# Allegro board kprd_03v1.brd
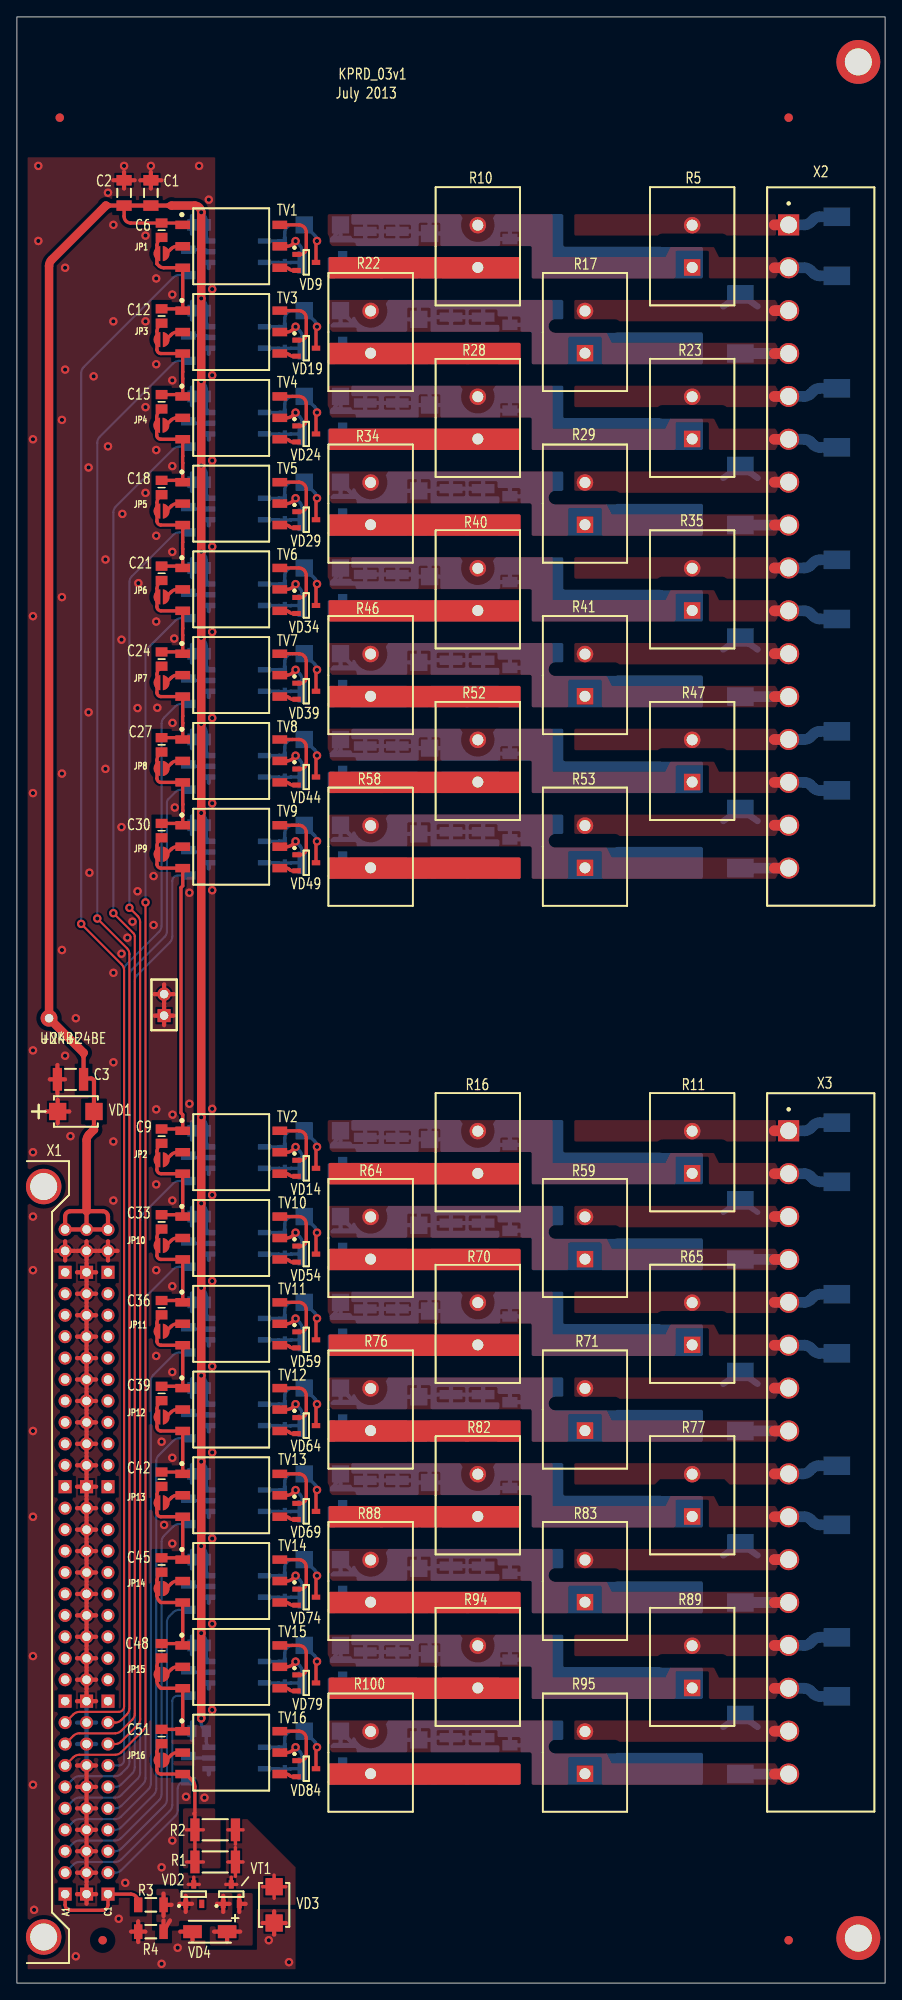
[diagram p0: board, top side]
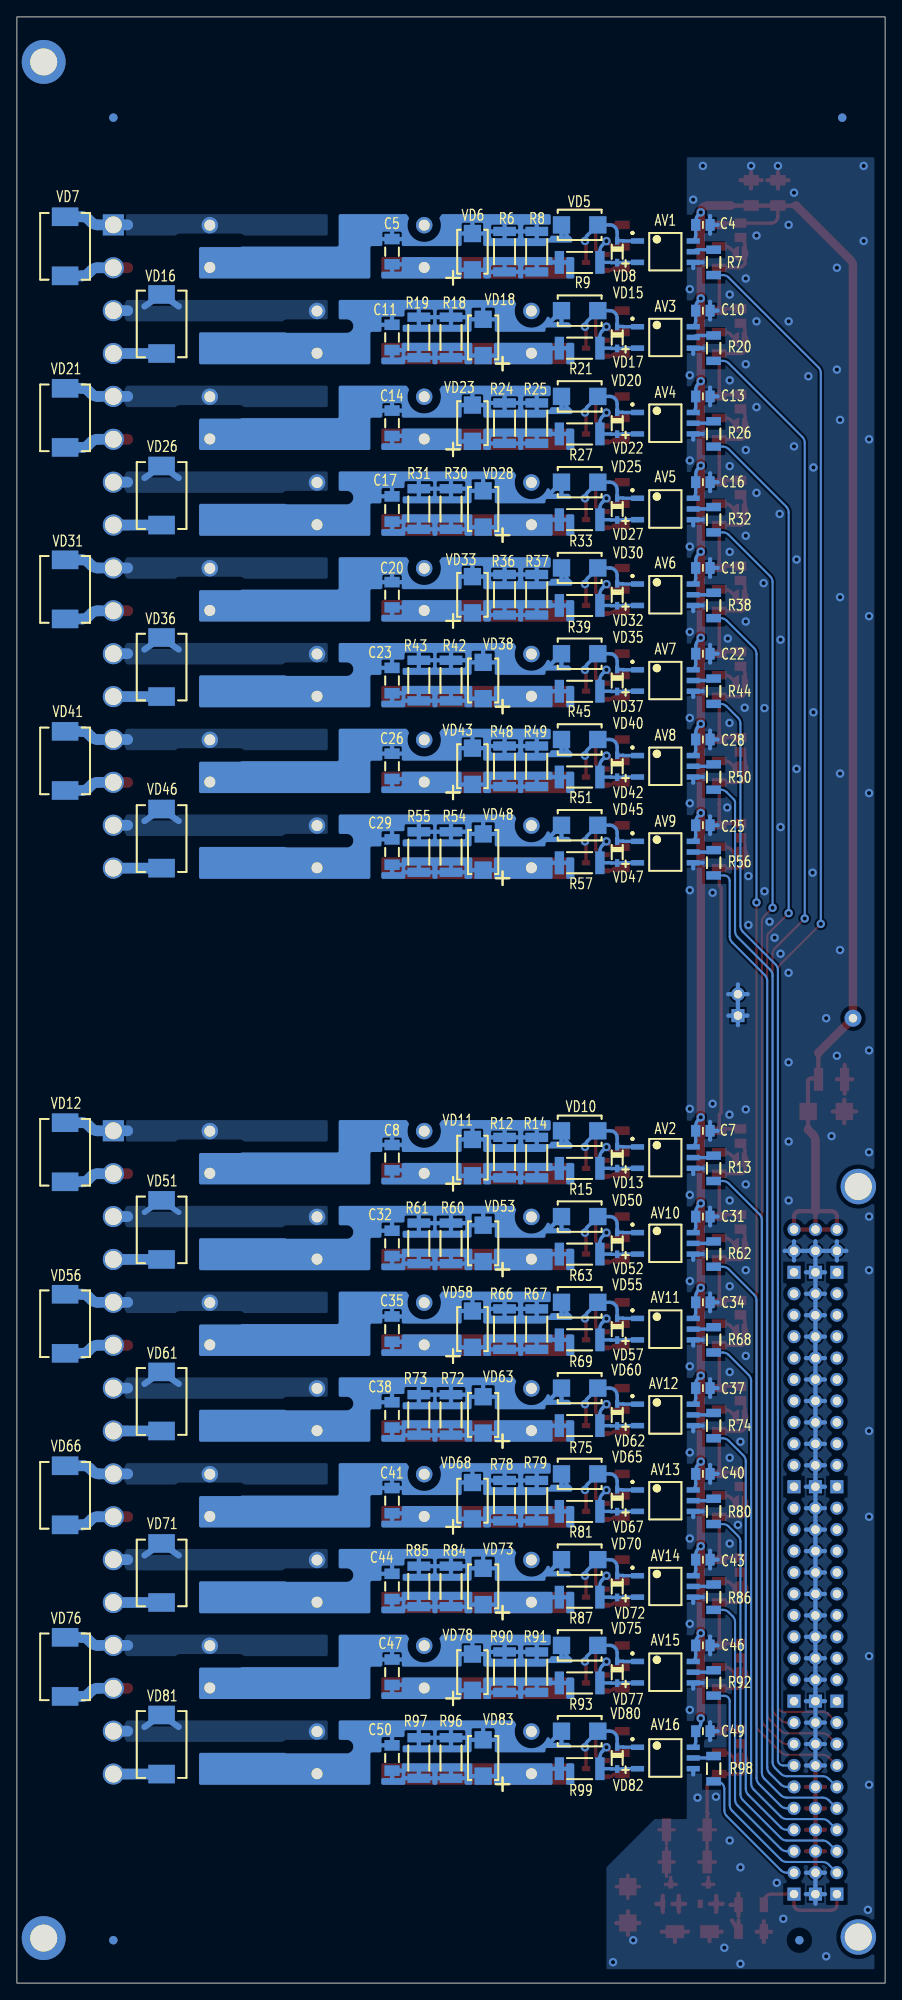
[diagram p1: board, bottom side, seen from below]

Outline 102.87 x 232.92 mm; copper layers: TOP, BOTTOM. Coordinates in mm from the lower left corner of the outline.
Outline path: rectangle 0,0 102.87,232.92

## Design rules (mm)
net group IN+: nets +IN1 +IN2 +IN3 +IN4 +IN5 +IN6 +IN7 +IN8 +IN9 +IN10 +IN11 +IN12 +IN13 +IN14 +IN15 +IN16
net group IN-: nets -IN1 -IN2 -IN3 -IN4 -IN5 -IN6 -IN7 -IN8 -IN9 -IN10 -IN11 -IN12 -IN13 -IN14 -IN15 -IN16
nets with their own width: min track width 0.4; nets +24BE

## Placement (name value [footprint] x y rotation side)
AV1  ACPL-M50L  [SOIC127P650X260-5]  26.04 205.1 180 bottom
AV2  ACPL-M50L  [SOIC127P650X260-5]  26.04 97.79 180 bottom
AV3  ACPL-M50L  [SOIC127P650X260-5]  26.04 194.94 180 bottom
AV4  ACPL-M50L  [SOIC127P650X260-5]  26.04 184.78 180 bottom
AV5  ACPL-M50L  [SOIC127P650X260-5]  26.04 174.62 180 bottom
AV6  ACPL-M50L  [SOIC127P650X260-5]  26.04 164.47 180 bottom
AV7  ACPL-M50L  [SOIC127P650X260-5]  26.04 154.31 180 bottom
AV8  ACPL-M50L  [SOIC127P650X260-5]  26.04 144.15 180 bottom
AV9  ACPL-M50L  [SOIC127P650X260-5]  26.04 133.99 180 bottom
AV10  ACPL-M50L  [SOIC127P650X260-5]  26.04 87.63 180 bottom
AV11  ACPL-M50L  [SOIC127P650X260-5]  26.04 77.47 180 bottom
AV12  ACPL-M50L  [SOIC127P650X260-5]  26.04 67.31 180 bottom
AV13  ACPL-M50L  [SOIC127P650X260-5]  26.04 57.15 180 bottom
AV14  ACPL-M50L  [SOIC127P650X260-5]  26.04 46.99 180 bottom
AV15  ACPL-M50L  [SOIC127P650X260-5]  26.04 36.83 180 bottom
AV16  ACPL-M50L  [SOIC127P650X260-5]  26.04 26.67 180 bottom
C1  0.1u  [CAPC3216X145N]  15.88 212.07 90 top
C2  1.0u  [CAPC3216X95N]  12.7 212.07 90 top
C3  10.0u  [CAPC3225X270N]  6.35 107.06 180 top
C4  0.1u  [CAPC2013X95N]  21.59 208.28 180 bottom
C5  0.1u  [CAPC3216X145N]  58.42 205.1 270 bottom
C6  2200p  [CAPC2013X70N]  17.14 207.65 270 top
C7  0.1u  [CAPC2013X95N]  21.59 100.97 180 bottom
C8  0.1u  [CAPC3216X145N]  58.42 97.79 270 bottom
C9  2200p  [CAPC2013X70N]  17.14 100.33 270 top
C10  0.1u  [CAPC2013X95N]  21.59 198.12 180 bottom
C11  0.1u  [CAPC3216X145N]  58.42 194.94 270 bottom
C12  2200p  [CAPC2013X70N]  17.14 197.48 270 top
C13  0.1u  [CAPC2013X95N]  21.59 187.96 180 bottom
C14  0.1u  [CAPC3216X145N]  58.42 184.78 270 bottom
C15  2200p  [CAPC2013X70N]  17.14 187.32 270 top
C16  0.1u  [CAPC2013X95N]  21.59 177.8 180 bottom
C17  0.1u  [CAPC3216X145N]  58.42 174.62 270 bottom
C18  2200p  [CAPC2013X70N]  17.14 177.16 270 top
C19  0.1u  [CAPC2013X95N]  21.59 167.64 180 bottom
C20  0.1u  [CAPC3216X145N]  58.42 164.47 270 bottom
C21  2200p  [CAPC2013X70N]  17.14 167 270 top
C22  0.1u  [CAPC2013X95N]  21.59 157.48 180 bottom
C23  0.1u  [CAPC3216X145N]  58.42 154.31 270 bottom
C24  2200p  [CAPC2013X70N]  17.14 156.84 270 top
C25  0.1u  [CAPC2013X95N]  21.59 137.16 180 bottom
C26  0.1u  [CAPC3216X145N]  58.42 144.15 270 bottom
C27  2200p  [CAPC2013X70N]  17.14 146.69 270 top
C28  0.1u  [CAPC2013X95N]  21.59 147.32 180 bottom
C29  0.1u  [CAPC3216X145N]  58.42 133.99 270 bottom
C30  2200p  [CAPC2013X70N]  17.14 136.53 270 top
C31  0.1u  [CAPC2013X95N]  21.59 90.8 180 bottom
C32  0.1u  [CAPC3216X145N]  58.42 87.63 270 bottom
C33  2200p  [CAPC2013X70N]  17.14 90.17 270 top
C34  0.1u  [CAPC2013X95N]  21.59 80.64 180 bottom
C35  0.1u  [CAPC3216X145N]  58.42 77.47 270 bottom
C36  2200p  [CAPC2013X70N]  17.14 80.01 270 top
C37  0.1u  [CAPC2013X95N]  21.59 70.48 180 bottom
C38  0.1u  [CAPC3216X145N]  58.42 67.31 270 bottom
C39  2200p  [CAPC2013X70N]  17.14 69.85 270 top
C40  0.1u  [CAPC2013X95N]  21.59 60.33 180 bottom
C41  0.1u  [CAPC3216X145N]  58.42 57.15 270 bottom
C42  2200p  [CAPC2013X70N]  17.14 59.69 270 top
C43  0.1u  [CAPC2013X95N]  21.59 50.17 180 bottom
C44  0.1u  [CAPC3216X145N]  58.42 46.99 270 bottom
C45  2200p  [CAPC2013X70N]  17.14 49.53 270 top
C46  0.1u  [CAPC2013X95N]  21.59 40 180 bottom
C47  0.1u  [CAPC3216X145N]  58.42 36.83 270 bottom
C48  2200p  [CAPC2013X70N]  17.14 39.37 270 top
C49  0.1u  [CAPC2013X95N]  21.59 29.84 180 bottom
C50  0.1u  [CAPC3216X145N]  58.42 26.67 270 bottom
C51  2200p  [CAPC2013X70N]  17.14 29.21 270 top
JP1  SMD_JUMPER  [SMD_JUMPER_2]  17.14 204.88 90 top
JP2  SMD_JUMPER  [SMD_JUMPER_2]  17.14 97.54 90 top
JP3  SMD_JUMPER  [SMD_JUMPER_2]  17.14 194.69 90 top
JP4  SMD_JUMPER  [SMD_JUMPER_2]  17.12 184.54 90 top
JP5  SMD_JUMPER  [SMD_JUMPER_2]  17.14 174.37 90 top
JP6  SMD_JUMPER  [SMD_JUMPER_2]  17.14 164.21 90 top
JP7  SMD_JUMPER  [SMD_JUMPER_2]  17.14 154.05 90 top
JP8  SMD_JUMPER  [SMD_JUMPER_2]  17.14 143.89 90 top
JP9  SMD_JUMPER  [SMD_JUMPER_2]  17.14 133.73 90 top
JP10  SMD_JUMPER  [SMD_JUMPER_2]  17.14 87.38 90 top
JP11  SMD_JUMPER  [SMD_JUMPER_2]  17.14 77.22 90 top
JP12  SMD_JUMPER  [SMD_JUMPER_2]  17.14 67.06 90 top
JP13  SMD_JUMPER  [SMD_JUMPER_2]  17.14 56.9 90 top
JP14  SMD_JUMPER  [SMD_JUMPER_2]  17.14 46.74 90 top
JP15  SMD_JUMPER  [SMD_JUMPER_2]  17.14 36.58 90 top
JP16  SMD_JUMPER  [SMD_JUMPER_2]  17.14 26.42 90 top
NOREF  -  [unnamed]  91.44 5.08 0 top
NOREF#2  -  [unnamed#2]  99.7 227.58 0 top
NOREF#3  -  [unnamed]  91.44 220.98 0 top
NOREF#4  -  [unnamed]  10.16 5.08 0 top
NOREF#5  -  [unnamed]  5.08 220.98 0 top
NOREF#6  -  [unnamed#2]  99.7 5.33 0 top
NOREF#7  -  [unnamed]  91.44 220.98 180 bottom
NOREF#8  -  [unnamed]  91.44 5.08 180 bottom
NOREF#9  -  [unnamed]  5.08 220.98 180 bottom
NOREF#10  -  [unnamed]  10.16 5.08 180 bottom
R1  1k  [RESC5025X65N]  23.5 14.35 180 top
R2  1k  [RESC5025X65N]  23.5 18.16 180 top
R3  1k  [RESC3116X65N]  15.88 9.27 0 top
R4  2k  [RESC3116X65N]  15.88 6.1 0 top
R5  5.1k  [RESV500P1300W900L2500H]  80.01 205.74 90 top
R6  1k  [RESC5025X65N]  45.08 205.1 90 bottom
R7  2k  [RESC3116X65N]  20.32 203.84 90 bottom
R8  1.2k  [RESC5025X65N]  41.28 205.1 90 bottom
R9  100  [RESC5025X65N]  36.2 203.84 0 bottom
R10  5.1k  [RESV500P1300W900L2500H]  54.61 205.74 90 top
R11  5.1k  [RESV500P1300W900L2500H]  80.01 98.42 90 top
R12  1k  [RESC5025X65N]  45.08 97.79 90 bottom
R13  2k  [RESC3116X65N]  20.32 96.52 90 bottom
R14  1.2k  [RESC5025X65N]  41.28 97.79 90 bottom
R15  100  [RESC5025X65N]  36.2 96.52 0 bottom
R16  5.1k  [RESV500P1300W900L2500H]  54.61 98.42 90 top
R17  5.1k  [RESV500P1300W900L2500H]  67.31 195.58 90 top
R18  1k  [RESC5025X65N]  51.44 194.94 90 bottom
R19  1.2k  [RESC5025X65N]  55.25 194.94 90 bottom
R20  2k  [RESC3116X65N]  20.32 193.67 90 bottom
R21  100  [RESC5025X65N]  36.2 193.67 0 bottom
R22  5.1k  [RESV500P1300W900L2500H]  41.91 195.58 90 top
R23  5.1k  [RESV500P1300W900L2500H]  80.01 185.42 90 top
R24  1k  [RESC5025X65N]  45.08 184.78 90 bottom
R25  1.2k  [RESC5025X65N]  41.28 184.78 90 bottom
R26  2k  [RESC3116X65N]  20.32 183.51 90 bottom
R27  100  [RESC5025X65N]  36.2 183.51 0 bottom
R28  5.1k  [RESV500P1300W900L2500H]  54.61 185.42 90 top
R29  5.1k  [RESV500P1300W900L2500H]  67.31 175.26 90 top
R30  1k  [RESC5025X65N]  51.44 174.62 90 bottom
R31  1.2k  [RESC5025X65N]  55.25 174.62 90 bottom
R32  2k  [RESC3116X65N]  20.32 173.35 90 bottom
R33  100  [RESC5025X65N]  36.2 173.35 0 bottom
R34  5.1k  [RESV500P1300W900L2500H]  41.91 175.26 90 top
R35  5.1k  [RESV500P1300W900L2500H]  80.01 165.1 90 top
R36  1k  [RESC5025X65N]  45.08 164.47 90 bottom
R37  1.2k  [RESC5025X65N]  41.28 164.47 90 bottom
R38  2k  [RESC3116X65N]  20.32 163.19 90 bottom
R39  100  [RESC5025X65N]  36.2 163.19 0 bottom
R40  5.1k  [RESV500P1300W900L2500H]  54.61 165.1 90 top
R41  5.1k  [RESV500P1300W900L2500H]  67.31 154.94 90 top
R42  1k  [RESC5025X65N]  51.44 154.31 90 bottom
R43  1.2k  [RESC5025X65N]  55.25 154.31 90 bottom
R44  2k  [RESC3116X65N]  20.32 153.03 90 bottom
R45  100  [RESC5025X65N]  36.2 153.03 0 bottom
R46  5.1k  [RESV500P1300W900L2500H]  41.91 154.94 90 top
R47  5.1k  [RESV500P1300W900L2500H]  80.01 144.78 90 top
R48  1k  [RESC5025X65N]  45.08 144.15 90 bottom
R49  1.2k  [RESC5025X65N]  41.28 144.15 90 bottom
R50  2k  [RESC3116X65N]  20.32 142.88 90 bottom
R51  100  [RESC5025X65N]  36.2 142.88 0 bottom
R52  5.1k  [RESV500P1300W900L2500H]  54.61 144.78 90 top
R53  5.1k  [RESV500P1300W900L2500H]  67.31 134.62 90 top
R54  1k  [RESC5025X65N]  51.44 133.99 90 bottom
R55  1.2k  [RESC5025X65N]  55.25 133.99 90 bottom
R56  2k  [RESC3116X65N]  20.32 132.72 90 bottom
R57  100  [RESC5025X65N]  36.2 132.72 0 bottom
R58  5.1k  [RESV500P1300W900L2500H]  41.91 134.62 90 top
R59  5.1k  [RESV500P1300W900L2500H]  67.31 88.27 90 top
R60  1k  [RESC5025X65N]  51.44 87.63 90 bottom
R61  1.2k  [RESC5025X65N]  55.25 87.63 90 bottom
R62  2k  [RESC3116X65N]  20.32 86.36 90 bottom
R63  100  [RESC5025X65N]  36.2 86.36 0 bottom
R64  5.1k  [RESV500P1300W900L2500H]  41.91 88.27 90 top
R65  5.1k  [RESV500P1300W900L2500H]  80.01 78.1 90 top
R66  1k  [RESC5025X65N]  45.08 77.47 90 bottom
R67  1.2k  [RESC5025X65N]  41.28 77.47 90 bottom
R68  2k  [RESC3116X65N]  20.32 76.2 90 bottom
R69  100  [RESC5025X65N]  36.2 76.2 0 bottom
R70  5.1k  [RESV500P1300W900L2500H]  54.61 78.1 90 top
R71  5.1k  [RESV500P1300W900L2500H]  67.31 67.95 90 top
R72  1k  [RESC5025X65N]  51.44 67.31 90 bottom
R73  1.2k  [RESC5025X65N]  55.25 67.31 90 bottom
R74  2k  [RESC3116X65N]  20.32 66.04 90 bottom
R75  100  [RESC5025X65N]  36.2 66.04 0 bottom
R76  5.1k  [RESV500P1300W900L2500H]  41.91 67.95 90 top
R77  5.1k  [RESV500P1300W900L2500H]  80.01 57.78 90 top
R78  1k  [RESC5025X65N]  45.08 57.15 90 bottom
R79  1.2k  [RESC5025X65N]  41.28 57.15 90 bottom
R80  2k  [RESC3116X65N]  20.32 55.88 90 bottom
R81  100  [RESC5025X65N]  36.2 55.88 0 bottom
R82  5.1k  [RESV500P1300W900L2500H]  54.61 57.78 90 top
R83  5.1k  [RESV500P1300W900L2500H]  67.31 47.62 90 top
R84  1k  [RESC5025X65N]  51.44 46.99 90 bottom
R85  1.2k  [RESC5025X65N]  55.25 46.99 90 bottom
R86  2k  [RESC3116X65N]  20.32 45.72 90 bottom
R87  100  [RESC5025X65N]  36.2 45.72 0 bottom
R88  5.1k  [RESV500P1300W900L2500H]  41.91 47.62 90 top
R89  5.1k  [RESV500P1300W900L2500H]  80.01 37.47 90 top
R90  1k  [RESC5025X65N]  45.08 36.83 90 bottom
R91  1.2k  [RESC5025X65N]  41.28 36.83 90 bottom
R92  2k  [RESC3116X65N]  20.32 35.56 90 bottom
R93  100  [RESC5025X65N]  36.2 35.56 0 bottom
R94  5.1k  [RESV500P1300W900L2500H]  54.61 37.47 90 top
R95  5.1k  [RESV500P1300W900L2500H]  67.31 27.3 90 top
R96  1k  [RESC5025X65N]  51.44 26.67 90 bottom
R97  1.2k  [RESC5025X65N]  55.25 26.67 90 bottom
R98  2k  [RESC3116X65N]  20.32 25.4 90 bottom
R99  100  [RESC5025X65N]  36.2 25.4 0 bottom
R100  5.1k  [RESV500P1300W900L2500H]  41.91 27.3 90 top
TV1  78253  [XFMR_78253MVC]  25.4 205.74 0 top
TV2  78253  [XFMR_78253MVC]  25.4 98.42 0 top
TV3  78253  [XFMR_78253MVC]  25.4 195.58 0 top
TV4  78253  [XFMR_78253MVC]  25.4 185.42 0 top
TV5  78253  [XFMR_78253MVC]  25.4 175.26 0 top
TV6  78253  [XFMR_78253MVC]  25.4 165.1 0 top
TV7  78253  [XFMR_78253MVC]  25.4 154.94 0 top
TV8  78253  [XFMR_78253MVC]  25.4 144.78 0 top
TV9  78253  [XFMR_78253MVC]  25.4 134.62 0 top
TV10  78253  [XFMR_78253MVC]  25.4 88.27 0 top
TV11  78253  [XFMR_78253MVC]  25.4 78.1 0 top
TV12  78253  [XFMR_78253MVC]  25.4 67.95 0 top
TV13  78253  [XFMR_78253MVC]  25.4 57.78 0 top
TV14  78253  [XFMR_78253MVC]  25.4 47.62 0 top
TV15  78253  [XFMR_78253MVC]  25.4 37.47 0 top
TV16  78253  [XFMR_78253MVC]  25.4 27.3 0 top
UNK+24BE  0.85mm  [MTG_085_200]  3.81 114.3 0 top
VD1  30B  [DIOM5236X261N]  6.98 103.25 180 top
VD2  BAT54C  [SOT95P230X110-3N]  20.95 10.54 90 top
VD3  47B  [DIOM5236X261N]  30.48 9.27 270 top
VD4  STPS160A  [DIOM5126X265N]  22.86 6.1 0 top
VD5  6.8B  [DIOM5236X261N]  36.2 208.28 180 bottom
VD6  18B  [DIOM5236X261N]  48.89 205.1 270 bottom
VD7  300B  [DIOM7959X262N]  97.16 205.74 270 bottom
VD8  1N4148WS  [SOD2513X100N]  31.75 205.1 270 bottom
VD9  BAT54C  [SOT95P230X110-3N]  34.29 203.84 0 top
VD10  6.8B  [DIOM5236X261N]  36.2 100.97 180 bottom
VD11  18B  [DIOM5236X261N]  48.89 97.79 270 bottom
VD12  300B  [DIOM7959X262N]  97.16 98.42 270 bottom
VD13  1N4148WS  [SOD2513X100N]  31.75 97.79 270 bottom
VD14  BAT54C  [SOT95P230X110-3N]  34.29 96.52 0 top
VD15  6.8B  [DIOM5236X261N]  36.2 198.12 180 bottom
VD16  300B  [DIOM7959X262N]  85.73 196.54 270 bottom
VD17  1N4148WS  [SOD2513X100N]  31.75 194.94 270 bottom
VD18  18B  [DIOM5236X261N]  47.62 194.94 270 bottom
VD19  BAT54C  [SOT95P230X110-3N]  34.29 193.67 0 top
VD20  6.8B  [DIOM5236X261N]  36.2 187.96 180 bottom
VD21  300B  [DIOM7959X262N]  97.16 185.42 270 bottom
VD22  1N4148WS  [SOD2513X100N]  31.75 184.78 270 bottom
VD23  18B  [DIOM5236X261N]  48.89 184.78 270 bottom
VD24  BAT54C  [SOT95P230X110-3N]  34.29 183.51 0 top
VD25  6.8B  [DIOM5236X261N]  36.2 177.8 180 bottom
VD26  300B  [DIOM7959X262N]  85.73 176.22 270 bottom
VD27  1N4148WS  [SOD2513X100N]  31.75 174.62 270 bottom
VD28  18B  [DIOM5236X261N]  47.62 174.62 270 bottom
VD29  BAT54C  [SOT95P230X110-3N]  34.29 173.35 0 top
VD30  6.8B  [DIOM5236X261N]  36.2 167.64 180 bottom
VD31  300B  [DIOM7959X262N]  97.16 165.1 270 bottom
VD32  1N4148WS  [SOD2513X100N]  31.75 164.47 270 bottom
VD33  18B  [DIOM5236X261N]  48.89 164.47 270 bottom
VD34  BAT54C  [SOT95P230X110-3N]  34.29 163.19 0 top
VD35  6.8B  [DIOM5236X261N]  36.2 157.48 180 bottom
VD36  300B  [DIOM7959X262N]  85.73 155.9 270 bottom
VD37  1N4148WS  [SOD2513X100N]  31.75 154.31 270 bottom
VD38  18B  [DIOM5236X261N]  47.62 154.31 270 bottom
VD39  BAT54C  [SOT95P230X110-3N]  34.29 153.03 0 top
VD40  6.8B  [DIOM5236X261N]  36.2 147.32 180 bottom
VD41  300B  [DIOM7959X262N]  97.16 144.78 270 bottom
VD42  1N4148WS  [SOD2513X100N]  31.75 144.15 270 bottom
VD43  18B  [DIOM5236X261N]  48.89 144.15 270 bottom
VD44  BAT54C  [SOT95P230X110-3N]  34.29 142.88 0 top
VD45  6.8B  [DIOM5236X261N]  36.2 137.16 180 bottom
VD46  300B  [DIOM7959X262N]  85.73 135.58 270 bottom
VD47  1N4148WS  [SOD2513X100N]  31.75 133.99 270 bottom
VD48  18B  [DIOM5236X261N]  47.62 133.99 270 bottom
VD49  BAT54C  [SOT95P230X110-3N]  34.29 132.72 0 top
VD50  6.8B  [DIOM5236X261N]  36.2 90.8 180 bottom
VD51  300B  [DIOM7959X262N]  85.73 89.22 270 bottom
VD52  1N4148WS  [SOD2513X100N]  31.75 87.63 270 bottom
VD53  18B  [DIOM5236X261N]  47.62 87.63 270 bottom
VD54  BAT54C  [SOT95P230X110-3N]  34.29 86.36 0 top
VD55  6.8B  [DIOM5236X261N]  36.2 80.64 180 bottom
VD56  300B  [DIOM7959X262N]  97.16 78.1 270 bottom
VD57  1N4148WS  [SOD2513X100N]  31.75 77.47 270 bottom
VD58  18B  [DIOM5236X261N]  48.89 77.47 270 bottom
VD59  BAT54C  [SOT95P230X110-3N]  34.29 76.2 0 top
VD60  6.8B  [DIOM5236X261N]  36.2 70.48 180 bottom
VD61  300B  [DIOM7959X262N]  85.73 68.91 270 bottom
VD62  1N4148WS  [SOD2513X100N]  31.75 67.31 270 bottom
VD63  18B  [DIOM5236X261N]  47.62 67.31 270 bottom
VD64  BAT54C  [SOT95P230X110-3N]  34.29 66.04 0 top
VD65  6.8B  [DIOM5236X261N]  36.2 60.33 180 bottom
VD66  300B  [DIOM7959X262N]  97.16 57.78 270 bottom
VD67  1N4148WS  [SOD2513X100N]  31.75 57.15 270 bottom
VD68  18B  [DIOM5236X261N]  48.89 57.15 270 bottom
VD69  BAT54C  [SOT95P230X110-3N]  34.29 55.88 0 top
VD70  6.8B  [DIOM5236X261N]  36.2 50.17 180 bottom
VD71  300B  [DIOM7959X262N]  85.73 48.58 270 bottom
VD72  1N4148WS  [SOD2513X100N]  31.75 46.99 270 bottom
VD73  18B  [DIOM5236X261N]  47.62 46.99 270 bottom
VD74  BAT54C  [SOT95P230X110-3N]  34.29 45.72 0 top
VD75  6.8B  [DIOM5236X261N]  36.2 40 180 bottom
VD76  300B  [DIOM7959X262N]  97.16 37.47 270 bottom
VD77  1N4148WS  [SOD2513X100N]  31.75 36.83 270 bottom
VD78  18B  [DIOM5236X261N]  48.89 36.83 270 bottom
VD79  BAT54C  [SOT95P230X110-3N]  34.29 35.56 0 top
VD80  6.8B  [DIOM5236X261N]  36.2 29.84 180 bottom
VD81  300B  [DIOM7959X262N]  85.73 28.27 270 bottom
VD82  1N4148WS  [SOD2513X100N]  31.75 26.67 270 bottom
VD83  18B  [DIOM5236X261N]  47.62 26.67 270 bottom
VD84  BAT54C  [SOT95P230X110-3N]  34.29 25.4 0 top
VT1  BCV72  [SOT95P230X110-3N]  25.4 10.54 90 top
X1  DIN-32x3  [DIN_41612_96_MR]  2.54 49.91 0 top
X2  231-576/001-000  [WAGO_231_576_001_000]  95.25 170.18 0 top
X3  231-576/001-000  [WAGO_231_576_001_000]  95.25 62.86 0 top
X4  GNDE  [HDRV1X2P254]  17.44 115.88 90 top

## Library data of the parts
AV1-AV16 = ACPL-M50L
C1-C51 = CAP_NP
JP1-JP16 = JUMPER_SMD_2
R1 R2 R6 R8 R9 R12 R14 R15 R18 R19 R21 R24 R25 R27 R30 R31 R33 R36 R37 R39 R42 R43 R45 R48 R49 R51 R54 R55 R57 R60 R61 R63 R66 R67 R69 R72 R73 R75 R78 R79 R81 R84 R85 R87 R90 R91 R93 R96 R97 R99 = RES_0.5W
R3 R4 R7 R13 R20 R26 R32 R38 R44 R50 R56 R62 R68 R74 R80 R86 R92 R98 = RES_0.25W
R5 R10 R11 R16 R17 R22 R23 R28 R29 R34 R35 R40 R41 R46 R47 R52 R53 R58 R59 R64 R65 R70 R71 R76 R77 R82 R83 R88 R89 R94 R95 R100 = RES_5W
TV1-TV16 = 78253
UNK+24BE = MOUNTING_HOLE_PLATED
VD1 VD3 VD5 VD7 VD10 VD12 VD15 VD16 VD20 VD21 VD25 VD26 VD30 VD31 VD35 VD36 VD40 VD41 VD45 VD46 VD50 VD51 VD55 VD56 VD60 VD61 VD65 VD66 VD70 VD71 VD75 VD76 VD80 VD81 = DIODE_TVS_BI
VD2 VD9 VD14 VD19 VD24 VD29 VD34 VD39 VD44 VD49 VD54 VD59 VD64 VD69 VD74 VD79 VD84 = DIODE_SCHOTTKY_DUAL_C
VD4 = DIODE_SCHOTTKY
VD6 VD11 VD18 VD23 VD28 VD33 VD38 VD43 VD48 VD53 VD58 VD63 VD68 VD73 VD78 VD83 = DIODE_TVS_UNI
VD8 VD13 VD17 VD22 VD27 VD32 VD37 VD42 VD47 VD52 VD57 VD62 VD67 VD72 VD77 VD82 = DIODE
VT1 = NPN_SOT23
X1 = CON_32X3
X2 X3 = CON_16
X4 = CON_2

## Footprints (pads in the part's own frame, mm; a bottom-side part is the same pattern mirrored in y, then rotated)
CAPC2013X70N
  rect 1.1x1.4 smd: 1(-0.85,0) 2(0.85,0)
CAPC2013X95N
  rect 1.1x1.4 smd: 1(-0.85,0) 2(0.85,0)
CAPC3216X95N
  rect 1.25x1.8 smd: 1(-1.5,0) 2(1.5,0)
CAPC3216X145N
  rect 1.25x1.8 smd: 1(-1.5,0) 2(1.5,0)
CAPC3225X270N
  rect 1.1x2.7 smd: 1(-1.55,0) 2(1.55,0)
DIN_41612_96_MR
  rect 1.55x1.55 hole 1: A1(3.175,-39.37) A10(3.175,-16.51) A20(3.175,8.89) A30(3.175,34.29) B1(5.715,-39.37) B10(5.715,-16.51) B20(5.715,8.89) B30(5.715,34.29) C1(8.255,-39.37) C10(8.255,-16.51) C20(8.255,8.89) C30(8.255,34.29)
  round 1.55 hole 1: A2(3.175,-36.83) A3(3.175,-34.29) A4(3.175,-31.75) A5(3.175,-29.21) A6(3.175,-26.67) A7(3.175,-24.13) A8(3.175,-21.59) A9(3.175,-19.05) A11(3.175,-13.97) A12(3.175,-11.43) A13(3.175,-8.89) A14(3.175,-6.35) A15(3.175,-3.81) A16(3.175,-1.27) A17(3.175,1.27) A18(3.175,3.81) A19(3.175,6.35) A21(3.175,11.43) A22(3.175,13.97) A23(3.175,16.51) A24(3.175,19.05) A25(3.175,21.59) A26(3.175,24.13) A27(3.175,26.67) A28(3.175,29.21) A29(3.175,31.75) A31(3.175,36.83) A32(3.175,39.37) B2(5.715,-36.83) B3(5.715,-34.29) B4(5.715,-31.75) B5(5.715,-29.21) B6(5.715,-26.67) B7(5.715,-24.13) B8(5.715,-21.59) B9(5.715,-19.05) B11(5.715,-13.97) B12(5.715,-11.43) B13(5.715,-8.89) B14(5.715,-6.35) B15(5.715,-3.81) B16(5.715,-1.27) B17(5.715,1.27) B18(5.715,3.81) B19(5.715,6.35) B21(5.715,11.43) B22(5.715,13.97) B23(5.715,16.51) B24(5.715,19.05) B25(5.715,21.59) B26(5.715,24.13) B27(5.715,26.67) B28(5.715,29.21) B29(5.715,31.75) B31(5.715,36.83) B32(5.715,39.37) C2(8.255,-36.83) C3(8.255,-34.29) C4(8.255,-31.75) C5(8.255,-29.21) C6(8.255,-26.67) C7(8.255,-24.13) C8(8.255,-21.59) C9(8.255,-19.05) C11(8.255,-13.97) C12(8.255,-11.43) C13(8.255,-8.89) C14(8.255,-6.35) C15(8.255,-3.81) C16(8.255,-1.27) C17(8.255,1.27) C18(8.255,3.81) C19(8.255,6.35) C21(8.255,11.43) C22(8.255,13.97) C23(8.255,16.51) C24(8.255,19.05) C25(8.255,21.59) C26(8.255,24.13) C27(8.255,26.67) C28(8.255,29.21) C29(8.255,31.75) C31(8.255,36.83) C32(8.255,39.37)
  round 4.2 hole 3.2: HOLE1(0.635,-44.45) HOLE2(0.635,44.45)
DIOM5126X265N
  rect 2.2x1.55 smd: A(2.05,0) C(-2.05,0)
DIOM5236X261N
  rect 2.05x2.05 smd: A(2.15,0) C(-2.15,0)
DIOM7959X262N
  rect 2.2x3.15 smd: A(3.5,0) C(-3.5,0)
HDRV1X2P254
  rect 1.55x1.55 hole 1: 1(-1.27,0)
  round 1.6 hole 1: 2(1.27,0)
MTG_085_200
  round 2 hole 1: 1(0,0)
RESC3116X65N
  rect 1x1.75 smd: 1(-1.5,0) 2(1.5,0)
RESC5025X65N
  rect 1.1x2.7 smd: 1(-2.4,0) 2(2.4,0)
RESV500P1300W900L2500H
  rect 1.95x1.95 hole 1.3: 1(-2.5,0)
  round 1.95 hole 1.3: 2(2.5,0)
SMD_JUMPER_2
  custom 1.8x0.8 smd: 1(0,0.55) 2(0,-0.55)
SOD2513X100N
  rect 0.9x0.5 smd: A(1.3,0) C(-1.3,0)
SOIC127P650X260-5
  rect 1.55x0.65 smd: 1(-3.3,1.27) 3(-3.3,-1.27) 4(3.3,-1.27) 5(3.3,0) 6(3.3,1.27)
SOT95P230X110-3N
  rect 1x0.6 smd: 1(-1.15,0.95) 2(-1.15,-0.95) 3(1.15,0)
unnamed
  round 1 smd: (0,0)
unnamed#2
  round 5.2 hole 3.2: 1(0,0)
WAGO_231_576_001_000
  rect 2.5x2.5 hole 2: 1(-3.81,38.1)
  round 2.5 hole 2: 2(-3.81,33.02) 3(-3.81,27.94) 4(-3.81,22.86) 5(-3.81,17.78) 6(-3.81,12.7) 7(-3.81,7.62) 8(-3.81,2.54) 9(-3.81,-2.54) 10(-3.81,-7.62) 11(-3.81,-12.7) 12(-3.81,-17.78) 13(-3.81,-22.86) 14(-3.81,-27.94) 15(-3.81,-33.02) 16(-3.81,-38.1)
XFMR_78253MVC
  rect 1.75x1 smd: 1(-5.75,2.54) 2(-5.75,0) 3(-5.75,-2.54) 4(5.75,-2.54) 5(5.75,0) 6(5.75,2.54)

## Nets
GNDE: AV1.4 AV2.4 AV3.4 AV4.4 AV5.4 AV6.4 AV7.4 AV8.4 AV9.4 AV10.4 AV11.4 AV12.4 AV13.4 AV14.4 AV15.4 AV16.4 C1.2 C2.2 C3.2 C4.2 C7.2 C10.2 C13.2 C16.2 C19.2 C22.2 C25.2 C28.2 C31.2 C34.2 C37.2 C40.2 C43.2 C46.2 C49.2 R4.1 VD1.A VD3.A VD4.C X1.A31 X1.B1 X1.B2 X1.B3 X1.B4 X1.B5 X1.B6 X1.B7 X1.B8 X1.B9 X1.B10 X1.B11 X1.B12 X1.B13 X1.B14 X1.B15 X1.B16 X1.B17 X1.B18 X1.B19 X1.B20 X1.B21 X1.B22 X1.B23 X1.B24 X1.B25 X1.B26 X1.B27 X1.B28 X1.B29 X1.B30 X1.B31 X1.C31 X4.1 X4.2
+24BE: AV1.6 AV2.6 AV3.6 AV4.6 AV5.6 AV6.6 AV7.6 AV8.6 AV9.6 AV10.6 AV11.6 AV12.6 AV13.6 AV14.6 AV15.6 AV16.6 C1.1 C2.1 C3.1 C4.1 C6.1 C7.1 C10.1 C13.1 C16.1 C19.1 C22.1 C25.1 C28.1 C31.1 C34.1 C37.1 C40.1 C43.1 C46.1 C49.1 TV1.1 UNK+24BE.1 VD1.C X1.A32 X1.B32 X1.C32
+IN1: R5.2 VD7.C X2.1
+IN2: R17.2 VD16.C X2.3
+IN3: R23.2 VD21.C X2.5
+IN4: R29.2 VD26.C X2.7
+IN5: R35.2 VD31.C X2.9
+IN6: R41.2 VD36.C X2.11
+IN7: R47.2 VD41.C X2.13
+IN8: R53.2 VD46.C X2.15
+IN9: R11.2 VD12.C X3.1
+IN10: R59.2 VD51.C X3.3
+IN11: R65.2 VD56.C X3.5
+IN12: R71.2 VD61.C X3.7
+IN13: R77.2 VD66.C X3.9
+IN14: R83.2 VD71.C X3.11
+IN15: R89.2 VD76.C X3.13
+IN16: R95.2 VD81.C X3.15
-IN1: R10.2 VD7.A X2.2
-IN2: R22.2 VD16.A X2.4
-IN3: R28.2 VD21.A X2.6
-IN4: R34.2 VD26.A X2.8
-IN5: R40.2 VD31.A X2.10
-IN6: R46.2 VD36.A X2.12
-IN7: R52.2 VD41.A X2.14
-IN8: R58.2 VD46.A X2.16
-IN9: R16.2 VD12.A X3.2
-IN10: R64.2 VD51.A X3.4
-IN11: R70.2 VD56.A X3.6
-IN12: R76.2 VD61.A X3.8
-IN13: R82.2 VD66.A X3.10
-IN14: R88.2 VD71.A X3.12
-IN15: R94.2 VD76.A X3.14
-IN16: R100.2 VD81.A X3.16
_IN+_A1: C5.1 R5.1 R6.2 R8.2 VD5.C VD6.C
_IN+_A1_B1: C11.1 R17.1 R18.2 R19.2 VD15.C VD18.C
_IN+_A1_B2: C29.1 R53.1 R54.2 R55.2 VD45.C VD48.C
_IN+_A1_B8: C14.1 R23.1 R24.2 R25.2 VD20.C VD23.C
_IN+_A1_B9: C17.1 R29.1 R30.2 R31.2 VD25.C VD28.C
_IN+_A1_B10: C20.1 R35.1 R36.2 R37.2 VD30.C VD33.C
_IN+_A1_B11: C23.1 R41.1 R42.2 R43.2 VD35.C VD38.C
_IN+_A1_B12: C26.1 R47.1 R48.2 R49.2 VD40.C VD43.C
_IN+_A2: C8.1 R11.1 R12.2 R14.2 VD10.C VD11.C
_IN+_A2_B1: C32.1 R59.1 R60.2 R61.2 VD50.C VD53.C
_IN+_A2_B2: C50.1 R95.1 R96.2 R97.2 VD80.C VD83.C
_IN+_A2_B8: C35.1 R65.1 R66.2 R67.2 VD55.C VD58.C
_IN+_A2_B9: C38.1 R71.1 R72.2 R73.2 VD60.C VD63.C
_IN+_A2_B10: C41.1 R77.1 R78.2 R79.2 VD65.C VD68.C
_IN+_A2_B11: C44.1 R83.1 R84.2 R85.2 VD70.C VD73.C
_IN+_A2_B12: C47.1 R89.1 R90.2 R91.2 VD75.C VD78.C
_IN-_A1: C5.2 R6.1 R8.1 R9.2 R10.1 VD6.A
_IN-_A1_B1: C11.2 R18.1 R19.1 R21.2 R22.1 VD18.A
_IN-_A1_B2: C29.2 R54.1 R55.1 R57.2 R58.1 VD48.A
_IN-_A1_B8: C14.2 R24.1 R25.1 R27.2 R28.1 VD23.A
_IN-_A1_B9: C17.2 R30.1 R31.1 R33.2 R34.1 VD28.A
_IN-_A1_B10: C20.2 R36.1 R37.1 R39.2 R40.1 VD33.A
_IN-_A1_B11: C23.2 R42.1 R43.1 R45.2 R46.1 VD38.A
_IN-_A1_B12: C26.2 R48.1 R49.1 R51.2 R52.1 VD43.A
_IN-_A2: C8.2 R12.1 R14.1 R15.2 R16.1 VD11.A
_IN-_A2_B1: C32.2 R60.1 R61.1 R63.2 R64.1 VD53.A
_IN-_A2_B2: C50.2 R96.1 R97.1 R99.2 R100.1 VD83.A
_IN-_A2_B8: C35.2 R66.1 R67.1 R69.2 R70.1 VD58.A
_IN-_A2_B9: C38.2 R72.1 R73.1 R75.2 R76.1 VD63.A
_IN-_A2_B10: C41.2 R78.1 R79.1 R81.2 R82.1 VD68.A
_IN-_A2_B11: C44.2 R84.1 R85.1 R87.2 R88.1 VD73.A
_IN-_A2_B12: C47.2 R90.1 R91.1 R93.2 R94.1 VD78.A
COMI0: R7.1 X1.A9
COMI1: R20.1 X1.C9
COMI2: R26.1 X1.A8
COMI3: R32.1 X1.C8
COMI4: R38.1 X1.A7
COMI5: R44.1 X1.C7
COMI6: R50.1 X1.A6
COMI7: R56.1 X1.C6
COMI8: R13.1 X1.A5
COMI9: R62.1 X1.C5
COMI10: R68.1 X1.A4
COMI11: R74.1 X1.C4
COMI12: R80.1 X1.A3
COMI13: R86.1 X1.C3
COMI14: R92.1 X1.A2
COMI15: R98.1 X1.C2
KCOMI: R3.1 X1.A1 X1.C1
N480618_A1: AV1.5 R7.2
N480618_A2: AV2.5 R13.2
N480650_A1: AV1.1 VD5.A VD8.C VD9.3(M)
N480650_A2: AV2.1 VD10.A VD13.C VD14.3(M)
N480654_A1: AV1.3 R9.1 TV1.5 VD8.A
N480654_A2: AV2.3 R15.1 TV2.5 VD13.A
N480782_A1: TV1.6 VD9.1(A1)
N480782_A2: TV2.6 VD14.1(A1)
N480786_A1: TV1.4 VD9.2(A2)
N480786_A2: TV2.4 VD14.2(A2)
N481190_A1: C12.2 C15.1 JP3.1 TV3.3 TV4.1
N481190_A2: C33.2 C36.1 JP10.1 TV10.3 TV11.1
N481194_A1: C15.2 C18.1 JP4.1 TV4.3 TV5.1
N481194_A2: C36.2 C39.1 JP11.1 TV11.3 TV12.1
N481198_A1: C18.2 C21.1 JP5.1 TV5.3 TV6.1
N481198_A2: C39.2 C42.1 JP12.1 TV12.3 TV13.1
N481202_A1: C21.2 C24.1 JP6.1 TV6.3 TV7.1
N481202_A2: C42.2 C45.1 JP13.1 TV13.3 TV14.1
N481206_A1: C24.2 C27.1 JP7.1 TV7.3 TV8.1
N481206_A2: C45.2 C48.1 JP14.1 TV14.3 TV15.1
N481210_A1: C27.2 C30.1 JP8.1 TV8.3 TV9.1
N481210_A2: C48.2 C51.1 JP15.1 TV15.3 TV16.1
N482214_A1_B1: AV3.5 R20.2
N482214_A1_B2: AV9.5 R56.2
N482214_A1_B8: AV4.5 R26.2
N482214_A1_B9: AV5.5 R32.2
N482214_A1_B10: AV6.5 R38.2
N482214_A1_B11: AV7.5 R44.2
N482214_A1_B12: AV8.5 R50.2
N482214_A2_B1: AV10.5 R62.2
N482214_A2_B2: AV16.5 R98.2
N482214_A2_B8: AV11.5 R68.2
N482214_A2_B9: AV12.5 R74.2
N482214_A2_B10: AV13.5 R80.2
N482214_A2_B11: AV14.5 R86.2
N482214_A2_B12: AV15.5 R92.2
N482246_A1_B1: AV3.1 VD15.A VD17.C VD19.3(M)
N482246_A1_B2: AV9.1 VD45.A VD47.C VD49.3(M)
N482246_A1_B8: AV4.1 VD20.A VD22.C VD24.3(M)
N482246_A1_B9: AV5.1 VD25.A VD27.C VD29.3(M)
N482246_A1_B10: AV6.1 VD30.A VD32.C VD34.3(M)
N482246_A1_B11: AV7.1 VD35.A VD37.C VD39.3(M)
N482246_A1_B12: AV8.1 VD40.A VD42.C VD44.3(M)
N482246_A2_B1: AV10.1 VD50.A VD52.C VD54.3(M)
N482246_A2_B2: AV16.1 VD80.A VD82.C VD84.3(M)
N482246_A2_B8: AV11.1 VD55.A VD57.C VD59.3(M)
N482246_A2_B9: AV12.1 VD60.A VD62.C VD64.3(M)
N482246_A2_B10: AV13.1 VD65.A VD67.C VD69.3(M)
N482246_A2_B11: AV14.1 VD70.A VD72.C VD74.3(M)
N482246_A2_B12: AV15.1 VD75.A VD77.C VD79.3(M)
N482250_A1_B1: AV3.3 R21.1 TV3.5 VD17.A
N482250_A1_B2: AV9.3 R57.1 TV9.5 VD47.A
N482250_A1_B8: AV4.3 R27.1 TV4.5 VD22.A
N482250_A1_B9: AV5.3 R33.1 TV5.5 VD27.A
N482250_A1_B10: AV6.3 R39.1 TV6.5 VD32.A
N482250_A1_B11: AV7.3 R45.1 TV7.5 VD37.A
N482250_A1_B12: AV8.3 R51.1 TV8.5 VD42.A
N482250_A2_B1: AV10.3 R63.1 TV10.5 VD52.A
N482250_A2_B2: AV16.3 R99.1 TV16.5 VD82.A
N482250_A2_B8: AV11.3 R69.1 TV11.5 VD57.A
N482250_A2_B9: AV12.3 R75.1 TV12.5 VD62.A
N482250_A2_B10: AV13.3 R81.1 TV13.5 VD67.A
N482250_A2_B11: AV14.3 R87.1 TV14.5 VD72.A
N482250_A2_B12: AV15.3 R93.1 TV15.5 VD77.A
N482394_A1_B1: TV3.6 VD19.1(A1)
N482394_A1_B2: TV9.6 VD49.1(A1)
N482394_A1_B8: TV4.6 VD24.1(A1)
N482394_A1_B9: TV5.6 VD29.1(A1)
N482394_A1_B10: TV6.6 VD34.1(A1)
N482394_A1_B11: TV7.6 VD39.1(A1)
N482394_A1_B12: TV8.6 VD44.1(A1)
N482394_A2_B1: TV10.6 VD54.1(A1)
N482394_A2_B2: TV16.6 VD84.1(A1)
N482394_A2_B8: TV11.6 VD59.1(A1)
N482394_A2_B9: TV12.6 VD64.1(A1)
N482394_A2_B10: TV13.6 VD69.1(A1)
N482394_A2_B11: TV14.6 VD74.1(A1)
N482394_A2_B12: TV15.6 VD79.1(A1)
N482398_A1_B1: TV3.4 VD19.2(A2)
N482398_A1_B2: TV9.4 VD49.2(A2)
N482398_A1_B8: TV4.4 VD24.2(A2)
N482398_A1_B9: TV5.4 VD29.2(A2)
N482398_A1_B10: TV6.4 VD34.2(A2)
N482398_A1_B11: TV7.4 VD39.2(A2)
N482398_A1_B12: TV8.4 VD44.2(A2)
N482398_A2_B1: TV10.4 VD54.2(A2)
N482398_A2_B2: TV16.4 VD84.2(A2)
N482398_A2_B8: TV11.4 VD59.2(A2)
N482398_A2_B9: TV12.4 VD64.2(A2)
N482398_A2_B10: TV13.4 VD69.2(A2)
N482398_A2_B11: TV14.4 VD74.2(A2)
N482398_A2_B12: TV15.4 VD79.2(A2)
N486268_A1: JP1.2 TV1.2
N486268_A2: JP2.2 TV2.2
N490493_A1_B1: JP3.2 TV3.2
N490493_A1_B2: JP9.2 TV9.2
N490493_A1_B8: JP4.2 TV4.2
N490493_A1_B9: JP5.2 TV5.2
N490493_A1_B10: JP6.2 TV6.2
N490493_A1_B11: JP7.2 TV7.2
N490493_A1_B12: JP8.2 TV8.2
N490493_A2_B1: JP10.2 TV10.2
N490493_A2_B2: JP16.2 TV16.2
N490493_A2_B8: JP11.2 TV11.2
N490493_A2_B9: JP12.2 TV12.2
N490493_A2_B10: JP13.2 TV13.2
N490493_A2_B11: JP14.2 TV14.2
N490493_A2_B12: JP15.2 TV15.2
TEST: C51.2 JP16.1 R1.2 R2.2 TV16.3
TO__A1: C6.2 C12.1 JP1.1 TV1.3 TV3.1
TO__A2: C9.2 C33.1 JP2.1 TV2.3 TV10.1
N478973: C9.1 C30.2 JP9.1 TV2.1 TV9.3
N491796: R3.2 R4.2 VD2.1(A1) VT1.1(B)
N491808: R1.1 R2.1 VD2.3(M) VD3.C VT1.3(C)
N491844: VD4.A VT1.2(E)

Pads without a net: NOREF#2 1; NOREF#6 1; VD2 2; X1 A10 A11 A12 A13 A14 A15 A16 A17 A18 A19 A20 A21 A22 A23 A24 A25 A26 A27 A28 A29 A30 C10 C11 C12 C13 C14 C15 C16 C17 C18 C19 C20 C21 C22 C23 C24 C25 C26 C27 C28 C29 C30 HOLE1 HOLE2

## Via types
v1: diameter 1, hole 0.5, TOP to BOTTOM, 163 vias

## Routing (per net, layer and track width the routed paths; a pad name or vN(x,y) marks a point on that pad's centre or on a via; arc(x,y) is an arc through that point)
GNDE: length 391.9
  TOP w0.5: X1.A31 5.71,87.87 ; X1.A31 4.59,86.74 ; X1.A31 5.71,85.61 ; X1.A31 6.84,86.74 ; X1.B23 8.25,67.55 ; X1.B23 7.13,66.42 ; X1.B23 9.38,66.42 ; X1.B23 8.25,65.29 ; X1.B26 9.38,74.04 ; X1.B26 8.25,72.91 ; X1.B26 8.25,75.17 ; X1.B26 7.13,74.04 ; X1.B4 8.25,19.29 ; X1.B4 8.25,17.03 ; X1.B4 7.13,18.16 ; X1.B4 9.38,18.16 ; X1.B31 9.38,86.74 ; X1.B31 8.25,85.61 ; X1.B31 8.25,87.87 ; X1.B31 7.13,86.74 ; 7.13,79.12 X1.B28 ; X1.B28 9.38,79.12 ; X1.B28 8.25,77.99 ; X1.B28 8.25,80.25 ; 7.13,35.94 X1.B11 ; X1.B11 9.38,35.94 ; X1.B11 8.25,34.81 ; X1.B11 8.25,37.07 ; X4.1 18.57,114.61 ; X4.1 16.31,114.61 ; X4.1 17.44,115.74 ; X4.1 17.44,113.48 ; 8.25,22.11 X1.B6 ; X1.B6 9.38,23.24 ; X1.B6 8.25,24.37 ; X1.B6 7.13,23.24 ; 7.13,71.5 X1.B25 ; X1.B25 9.38,71.5 ; X1.B25 8.25,72.63 ; X1.B25 8.25,70.37 ; 16.29,117.15 X4.2 ; X4.2 17.44,116 ; X4.2 17.44,118.3 ; X4.2 18.59,117.15 ; 9.67,86.74 X1.C31 ; X1.C31 11.92,86.74 ; X1.C31 10.79,85.61 ; X1.C31 10.79,87.87 ; 14.38,4.87 R4.1 ; R4.1 15.23,6.1 ; R4.1 13.52,6.1 ; R4.1 14.38,7.32 ; X1.B21 8.25,62.47 ; X1.B21 8.25,60.21 ; X1.B21 7.13,61.34 ; X1.B21 9.38,61.34 ; 7.13,51.18 X1.B17 ; X1.B17 9.38,51.18 ; X1.B17 8.25,50.05 ; X1.B17 8.25,52.31 ; 7.13,76.58 X1.B27 ; X1.B27 8.25,75.45 ; X1.B27 9.38,76.58 ; X1.B27 8.25,77.71 ; 8.25,39.89 X1.B13 ; X1.B13 7.13,41.02 ; X1.B13 8.25,42.15 ; X1.B13 9.38,41.02 ; X1.B15 8.25,47.23 ; X1.B15 9.38,46.1 ; X1.B15 8.25,44.97 ; X1.B15 7.13,46.1 ; X1.B19 8.25,57.39 ; X1.B19 9.38,56.26 ; X1.B19 7.13,56.26 ; X1.B19 8.25,55.13 ; 8.25,57.67 X1.B20 ; X1.B20 9.38,58.8 ; X1.B20 7.13,58.8 ; X1.B20 8.25,59.93 ; C1.2 17.13,213.57 ; C1.2 15.88,214.54 ; C1.2 15.88,212.59 ; C1.2 14.62,213.57 ; 12.7,212.59 C2.2 ; C2.2 11.45,213.57 ; C2.2 13.95,213.57 ; C2.2 12.7,214.54 ; C3.2 4.8,108.76 ; C3.2 4.8,105.36 ; C3.2 5.7,107.06 ; C3.2 3.9,107.06 ; 7.13,63.88 X1.B22 ; X1.B22 9.38,63.88 ; X1.B22 8.25,65.01 ; X1.B22 8.25,62.75 ; VD1.A 6.21,103.25 ; VD1.A 4.83,104.63 ; VD1.A 4.83,101.87 ; VD1.A 3.46,103.25 ; 8.25,14.49 X1.B3 ; X1.B3 7.13,15.62 ; X1.B3 9.38,15.62 ; X1.B3 8.25,16.75 ; VD3.A 31.86,7.12 ; VD3.A 29.1,7.12 ; VD3.A 30.48,5.74 ; VD3.A 30.48,8.5 ; X1.B12 9.38,38.48 ; X1.B12 8.25,37.35 ; X1.B12 8.25,39.61 ; X1.B12 7.13,38.48 ; X1.B16 9.38,48.64 ; X1.B16 8.25,49.77 ; X1.B16 7.13,48.64 ; X1.B16 8.25,47.51 ; X1.B1 9.38,10.54 ; X1.B1 8.25,9.41 ; X1.B1 7.13,10.54 ; X1.B1 8.25,11.67 ; X1.B24 8.25,70.09 ; X1.B24 9.38,68.96 ; X1.B24 7.13,68.96 ; X1.B24 8.25,67.83 ; X1.B2 8.25,14.21 ; X1.B2 9.38,13.08 ; X1.B2 8.25,11.95 ; X1.B2 7.13,13.08 ; X1.B14 8.25,44.69 ; X1.B14 8.25,42.43 ; X1.B14 9.38,43.56 ; X1.B14 7.13,43.56 ; 7.13,33.4 X1.B10 ; X1.B10 9.38,33.4 ; X1.B10 8.25,34.53 ; X1.B30 9.38,84.2 ; X1.B30 8.25,85.33 ; X1.B30 8.25,83.07 ; X1.B30 7.13,84.2 ; 8.25,52.59 X1.B18 ; X1.B18 7.13,53.72 ; X1.B18 9.38,53.72 ; X1.B18 8.25,54.85 ; 19.36,6.1 20.81,6.1 20.81,4.97 ; 8.25,19.57 X1.B5 ; X1.B5 8.25,21.83 ; X1.B5 7.13,20.7 ; X1.B5 9.38,20.7 ; 8.25,80.53 X1.B29 ; X1.B29 8.25,82.79 ; X1.B29 7.13,81.66 ; X1.B29 9.38,81.66 ; 7.13,25.78 X1.B7 ; X1.B7 8.25,24.65 ; X1.B7 9.38,25.78
  BOTTOM w0.5: C49.2 20.74,30.9 ; C49.2 19.84,29.84 ; C49.2 20.74,28.79 ; 7.13,30.86 X1.B9 ; X1.B9 8.25,31.99 ; X1.B9 8.25,29.73 ; X1.B9 9.38,30.86 ; X4.2 18.59,117.15 ; X4.2 17.44,118.3 ; X4.2 16.29,117.15 ; X4.2 17.44,116 ; X1.B16 8.25,49.77 ; X1.B16 7.13,48.64 ; X1.B16 8.25,47.51 ; X1.B16 9.38,48.64 ; 21.61,163.19 AV6.4 22.73,162.52 ; X1.B1 8.25,11.67 ; X1.B1 9.38,10.54 ; X1.B1 7.13,10.54 ; X1.B1 8.25,9.41 ; X1.B26 8.25,75.17 ; X1.B26 7.13,74.04 ; X1.B26 8.25,72.91 ; X1.B26 9.38,74.04 ; C34.2 20.74,81.7 ; C34.2 19.84,80.64 ; C34.2 20.74,79.59 ; X1.B25 9.38,71.5 ; X1.B25 8.25,70.37 ; X1.B25 8.25,72.63 ; X1.B25 7.13,71.5 ; X1.B29 9.38,81.66 ; X1.B29 8.25,80.53 ; X1.B29 8.25,82.79 ; X1.B29 7.13,81.66 ; C46.2 20.74,41.06 ; C46.2 20.74,38.95 ; C46.2 19.84,40 ; 7.13,38.48 X1.B12 ; X1.B12 8.25,37.35 ; X1.B12 9.38,38.48 ; X1.B12 8.25,39.61 ; X1.A31 5.71,87.87 ; X1.A31 4.59,86.74 ; X1.A31 5.71,85.61 ; X1.A31 6.84,86.74 ; C37.2 20.74,71.54 ; C37.2 20.74,69.43 ; C37.2 19.84,70.48 ; 21.61,86.36 AV10.4 22.73,85.68 ; X1.B11 9.38,35.94 ; X1.B11 8.25,37.07 ; X1.B11 7.13,35.94 ; X1.B11 8.25,34.81 ; 16.31,114.61 X4.1 ; X4.1 18.57,114.61 ; X4.1 17.44,115.74 ; X4.1 17.44,113.48 ; 7.13,84.2 X1.B30 ; X1.B30 9.38,84.2 ; X1.B30 8.25,83.07 ; X1.B30 8.25,85.33 ; 19.84,177.8 C16.2 ; C16.2 20.74,178.85 ; C16.2 20.74,176.75 ; 8.25,55.13 X1.B19 ; X1.B19 7.13,56.26 ; X1.B19 8.25,57.39 ; X1.B19 9.38,56.26 ; X1.B10 9.38,33.4 ; X1.B10 8.25,32.27 ; X1.B10 8.25,34.53 ; X1.B10 7.13,33.4 ; 22.73,95.84 AV2.4 21.61,96.52 ; 19.84,137.16 C25.2 ; C25.2 20.74,138.21 ; C25.2 20.74,136.11 ; 21.61,55.88 AV13.4 22.73,55.2 ; 8.25,57.67 X1.B20 ; X1.B20 7.13,58.8 ; X1.B20 9.38,58.8 ; X1.B20 8.25,59.93 ; X1.B14 9.38,43.56 ; X1.B14 7.13,43.56 ; X1.B14 8.25,44.69 ; X1.B14 8.25,42.43 ; C7.2 20.74,102.02 ; C7.2 20.74,99.91 ; C7.2 19.84,100.97 ; 7.13,63.88 X1.B22 ; X1.B22 8.25,65.01 ; X1.B22 8.25,62.75 ; X1.B22 9.38,63.88 ; 21.61,76.2 AV11.4 22.73,75.52 ; 8.25,39.89 X1.B13 ; X1.B13 8.25,42.15 ; X1.B13 9.38,41.02 ; X1.B13 7.13,41.02 ; 7.13,53.72 X1.B18 ; X1.B18 8.25,52.59 ; X1.B18 8.25,54.85 ; X1.B18 9.38,53.72 ; C28.2 20.74,148.37 ; C28.2 19.84,147.32 ; C28.2 20.74,146.27 ; X1.C31 11.92,86.74 ; X1.C31 10.79,87.87 ; X1.C31 9.67,86.74 ; X1.C31 10.79,85.61 ; 8.25,50.05 X1.B17 ; X1.B17 9.38,51.18 ; X1.B17 7.13,51.18 ; X1.B17 8.25,52.31 ; X1.B2 9.38,13.08 ; X1.B2 8.25,11.95 ; X1.B2 7.13,13.08 ; 22.73,132.04 AV9.4 21.61,132.72 ; 8.25,77.99 X1.B28 ; X1.B28 8.25,80.25 ; X1.B28 7.13,79.12 ; X1.B28 9.38,79.12 ; 8.25,85.61 X1.B31 ; X1.B31 7.13,86.74 ; X1.B31 9.38,86.74 ; X1.B31 8.25,87.87 ; 22.73,24.72 AV16.4 ; 21.61,45.72 22.73,45.72 22.73,45.04 ; 21.61,153.03 AV7.4 22.73,152.36 ; 19.84,60.33 C40.2 ; C40.2 20.74,61.38 ; C40.2 20.74,59.27 ; 21.61,173.35 AV5.4 22.73,172.68 ; 19.84,198.12 C10.2 ; C10.2 20.74,199.17 ; C10.2 20.74,197.07 ; X1.B21 9.38,61.34 ; X1.B21 7.13,61.34 ; X1.B21 8.25,62.47 ; X1.B21 8.25,60.21 ; 7.13,76.58 X1.B27 ; X1.B27 8.25,77.71 ; X1.B27 9.38,76.58 ; X1.B27 8.25,75.45 ; 8.25,44.97 X1.B15 ; X1.B15 9.38,46.1 ; X1.B15 7.13,46.1 ; X1.B15 8.25,47.23 ; 7.13,28.32 X1.B8 ; X1.B8 8.25,27.19 ; X1.B8 9.38,28.32 ; X1.B8 8.25,29.45 ; 19.84,167.64 C19.2 ; C19.2 20.74,168.69 ; C19.2 20.74,166.59 ; 21.61,35.56 AV15.4 22.73,34.88 ; C22.2 20.74,158.53 ; C22.2 20.74,156.43 ; C22.2 19.84,157.48 ; C4.2 20.74,209.33 ; C4.2 19.84,208.28 ; C4.2 20.74,207.23 ; C13.2 20.74,189.01 ; C13.2 19.84,187.96 ; C13.2 20.74,186.91 ; X1.B24 9.38,68.96 ; X1.B24 8.25,67.83 ; X1.B24 7.13,68.96 ; X1.B24 8.25,70.09 ; 8.25,65.29 X1.B23 ; X1.B23 8.25,67.55 ; X1.B23 7.13,66.42 ; X1.B23 9.38,66.42 ; 21.61,66.04 22.73,66.04 22.73,65.36 ; X1.B7 9.38,25.78 ; X1.B7 8.25,26.91 ; X1.B7 7.13,25.78 ; C43.2 20.74,51.22 ; C43.2 19.84,50.17 ; C43.2 20.74,49.11 ; 21.61,203.84 AV1.4 22.73,203.16 ; 21.61,142.88 AV8.4 22.73,142.2 ; 21.61,193.67 AV3.4 22.73,193 ; C31.2 20.74,91.86 ; C31.2 20.74,89.75 ; C31.2 19.84,90.8 ; 22.73,182.84 AV4.4 21.61,183.51
  vias: v1(1.9,182.88) v1(1.9,161.92) v1(1.9,140.97) v1(1.9,110.49) v1(1.9,98.42) v1(1.9,90.8) v1(1.9,84.45) v1(1.9,65.41) v1(1.9,55.25) v1(1.9,38.73) v1(1.9,23.5) v1(2.04,8.68) v1(2.54,215.26) v1(2.54,206.38) v1(5.34,185.18) v1(5.34,164.18) v1(5.34,143.28) v1(5.34,122.38) v1(5.71,203.2) v1(5.71,191.13) v1(5.71,109.85) v1(6.35,100.33) v1(6.98,114.3) v1(6.98,3.18) v1(8.49,179.54) v1(8.49,150.54) v1(8.59,131.54) v1(9.09,190.34) v1(10.5,168.64) v1(10.5,143.84) v1(10.79,212.09) v1(10.79,182.04) v1(11.43,208.28) v1(11.43,196.85) v1(11.44,119.68) v1(11.44,109.08) v1(11.43,99.69) v1(11.43,92.71) v1(12.06,7.62) v1(12.39,159.14) v1(12.39,136.94) v1(12.39,121.94) v1(12.5,174.04) v1(12.7,215.26) v1(12.84,11.88) v1(13.09,123.84) v1(13.7,125.74) v1(14.29,151.04) v1(14.29,129.34) v1(14.39,165.84) v1(15.24,207.01) v1(15.24,196.85) v1(15.24,186.69) v1(15.24,176.53) v1(15.88,215.26) v1(16.2,131.14) v1(16.2,125.34) v1(16.51,201.93) v1(16.51,191.77) v1(16.51,181.61) v1(16.51,171.45) v1(16.51,161.29) v1(16.51,103.5) v1(16.51,94.61) v1(16.51,84.45) v1(16.51,74.3) v1(16.64,151.08) v1(17.14,64.14) v1(17.14,13.72) v1(17.14,2.29) v1(17.44,54.28) v1(18.41,200.03) v1(18.41,189.87) v1(18.41,179.7) v1(18.41,169.54) v1(18.44,149.28) v1(18.44,102.88) v1(18.41,92.71) v1(18.41,82.55) v1(18.41,72.39) v1(18.41,62.23) v1(18.41,52.07) v1(18.41,16.89) v1(18.64,159.28) v1(18.71,139.26) v1(19.05,4.19) v1(20.04,22.08) v1(20.44,129.16) v1(20.44,104.16) v1(21.59,215.26) v1(22.23,21.97) v1(22.74,211.26) v1(23.14,200.66) v1(23.14,190.47) v1(23.14,180.37) v1(23.14,170.16) v1(23.14,160.06) v1(23.14,149.87) v1(23.14,139.76) v1(23.14,129.47) v1(23.14,103.56) v1(23.14,93.36) v1(23.14,83.16) v1(23.14,73.06) v1(23.14,62.86) v1(23.14,52.67) v1(23.14,42.56) v1(23.14,32.37) v1(29.84,5.08) v1(32.24,2.48)
+24BE: length 401.3
  TOP w0.4: C2.1 12.7,209.3 arc(12.93,208.73) 13.5,208.5 C6.1 19.13,208.5 arc(19.41,208.44) 19.65,208.28
  TOP w0.5: 18.33,210.57 C1.1 C2.1 10.54,210.57 ; 8.25,91.44 10.16,91.44 arc(10.61,91.25) 10.79,90.8 X1.C32 X1.B32 ; 8.25,91.44 X1.B32 ; 8.25,91.44 6.35,91.44 arc(5.9,91.25) 5.71,90.8 X1.A32 X1.B32 ; 9.13,101.1 VD1.C 9.13,106.82 arc(9.03,107.07) 8.78,107.17 8.01,107.17 C3.1 7.9,110.21
  TOP w1: 10.54,210.57 4.1,204.13 arc(3.89,203.8) 3.81,203.42 UNK+24BE.1 7.9,110.21 ; 9.13,101.1 8.55,100.51 arc(8.33,100.19) 8.25,99.81 8.25,91.44 ; 18.33,210.57 21.05,210.57 arc(21.61,210.34) 21.84,209.78 v1(21.84,209.76) v1(21.84,199.57) v1(21.84,189.76) v1(21.84,179.76) v1(21.84,169.56) v1(21.84,159.37) v1(21.84,149.16) v1(21.84,138.61) v1(21.84,102.56) v1(21.84,92.36) v1(21.84,82.36) v1(21.84,71.97) v1(21.84,61.77) v1(21.84,51.77) v1(21.84,41.45) v1(21.84,31.37)
  BOTTOM w0.4: v1(21.84,149.16) 22.15,148.86 arc(22.36,148.53) 22.44,148.15 C28.1 22.44,146.12 arc(22.52,145.74) 22.73,145.42 AV8.6 ; v1(21.84,159.37) 22.15,159.06 arc(22.36,158.73) 22.44,158.35 C22.1 22.44,156.28 arc(22.52,155.9) 22.73,155.58 AV7.6 ; v1(21.84,92.36) 22.15,92.06 arc(22.36,91.73) 22.44,91.35 C31.1 22.44,89.61 arc(22.52,89.23) 22.73,88.9 AV10.6 ; v1(21.84,209.76) 22.15,209.46 arc(22.36,209.13) 22.44,208.75 C4.1 22.44,207.08 arc(22.52,206.7) 22.73,206.38 AV1.6 ; v1(21.84,102.56) 22.15,102.26 arc(22.36,101.93) 22.44,101.55 C7.1 22.44,99.77 arc(22.52,99.39) 22.73,99.06 22.73,99.06 ; AV5.6 22.73,175.9 arc(22.52,176.22) 22.44,176.6 C16.1 22.44,178.75 arc(22.36,179.13) 22.15,179.46 v1(21.84,179.76) ; AV16.6 22.73,27.94 arc(22.52,28.27) 22.44,28.65 C49.1 22.13,30.15 arc(21.92,30.48) 21.84,30.86 v1(21.84,31.37) ; v1(21.84,138.61) 21.84,138.56 22.15,138.26 arc(22.36,137.93) 22.44,137.55 C25.1 22.44,135.96 arc(22.52,135.58) 22.73,135.26 AV9.6 ; AV4.6 22.73,186.06 arc(22.52,186.38) 22.44,186.76 C13.1 22.44,188.75 arc(22.36,189.13) 22.15,189.46 v1(21.84,189.76) ; AV3.6 22.73,196.22 arc(22.52,196.54) 22.44,196.92 C10.1 22.44,198.55 arc(22.36,198.93) 22.15,199.26 21.84,199.56 v1(21.84,199.57) ; AV6.6 22.73,165.74 arc(22.52,166.06) 22.44,166.44 C19.1 22.44,168.55 arc(22.36,168.93) 22.15,169.26 v1(21.84,169.56) ; v1(21.84,82.36) 22.15,82.06 arc(22.36,81.73) 22.44,81.35 C34.1 22.44,79.45 arc(22.52,79.07) 22.73,78.74 AV11.6 ; AV13.6 22.73,58.42 arc(22.52,58.75) 22.44,59.13 C40.1 22.44,60.75 arc(22.36,61.13) 22.15,61.46 21.84,61.77 v1(21.84,61.77) ; AV12.6 22.73,68.58 arc(22.52,68.91) 22.44,69.29 C37.1 22.44,70.95 arc(22.36,71.33) 22.15,71.66 v1(21.84,71.97) ; AV14.6 22.73,48.26 arc(22.52,48.59) 22.44,48.97 C43.1 22.44,50.75 arc(22.36,51.13) 22.15,51.46 v1(21.84,51.77) ; AV15.6 22.73,38.1 arc(22.52,38.43) 22.44,38.81 C46.1 22.44,40.35 arc(22.36,40.73) 22.15,41.06 21.84,41.37 v1(21.84,41.45)
+IN1: length 9.4
  TOP w1.27: 89.74,208.28 X2.1
  BOTTOM w1.27: VD7.C 95.11,209.24 arc(94.73,209.16) 94.4,208.95 94.03,208.57 arc(93.7,208.36) 93.32,208.28 X2.1 89.74,208.28
+IN2: length 8.3
  TOP w1.27: 89.74,198.12 X2.3
  BOTTOM w0.75: 83.7,198.62 VD16.C 87.75,198.62
  BOTTOM w1.27: 89.74,198.12 X2.3
+IN3: length 9.4
  TOP w1.27: 89.74,187.96 X2.5
  BOTTOM w1.27: 89.74,187.96 X2.5 93.32,187.96 arc(93.7,188.04) 94.03,188.25 94.4,188.63 arc(94.73,188.84) 95.11,188.92 VD21.C
+IN4: length 8.3
  TOP w1.27: 89.74,177.8 X2.7
  BOTTOM w0.75: 87.75,178.3 VD26.C 83.7,178.3
  BOTTOM w1.27: 89.74,177.8 X2.7
+IN5: length 9.4
  TOP w1.27: 89.74,167.64 X2.9
  BOTTOM w1.27: 89.74,167.64 X2.9 93.32,167.64 arc(93.7,167.72) 94.03,167.93 94.4,168.31 arc(94.73,168.52) 95.11,168.6 VD31.C
+IN6: length 8.3
  TOP w1.27: 89.74,157.48 X2.11
  BOTTOM w0.75: 87.75,157.98 VD36.C 83.7,157.98
  BOTTOM w1.27: 89.74,157.48 X2.11
+IN7: length 9.4
  TOP w1.27: 89.74,147.32 X2.13
  BOTTOM w1.27: 89.74,147.32 X2.13 93.32,147.32 arc(93.7,147.4) 94.03,147.61 94.4,147.99 arc(94.73,148.2) 95.11,148.28 VD41.C
+IN8: length 8.3
  TOP w1.27: 89.74,137.16 X2.15
  BOTTOM w0.75: 87.75,137.66 VD46.C 83.7,137.66
  BOTTOM w1.27: 89.74,137.16 X2.15
+IN9: length 9.4
  TOP w1.27: 89.74,100.97 X3.1
  BOTTOM w1.27: VD12.C 95.11,101.92 arc(94.73,101.85) 94.4,101.63 94.03,101.26 arc(93.7,101.04) 93.32,100.97 X3.1 89.74,100.97
+IN10: length 8.3
  TOP w1.27: 89.74,90.8 X3.3
  BOTTOM w0.65: 87.75,91.31 VD51.C 83.7,91.31
  BOTTOM w1.27: 89.74,90.8 X3.3
+IN11: length 9.4
  TOP w1.27: 89.74,80.64 X3.5
  BOTTOM w1.27: 89.74,80.64 X3.5 93.32,80.64 arc(93.7,80.72) 94.03,80.94 94.4,81.31 arc(94.73,81.53) 95.11,81.6 VD56.C
+IN12: length 8.3
  TOP w1.27: 89.74,70.48 X3.7
  BOTTOM w0.75: 87.75,70.99 VD61.C 83.7,70.99
  BOTTOM w1.27: 89.74,70.48 X3.7
+IN13: length 9.4
  TOP w1.27: 89.74,60.33 X3.9
  BOTTOM w1.27: VD66.C 94.95,61.28 arc(94.57,61.21) 94.24,60.99 93.87,60.62 arc(93.54,60.4) 93.16,60.33 X3.9 89.74,60.33
+IN14: length 8.3
  TOP w1.27: 89.74,50.17 X3.11
  BOTTOM w0.75: 83.7,50.67 VD71.C 87.75,50.67
  BOTTOM w1.27: 89.74,50.17 X3.11
+IN15: length 9.4
  TOP w1.27: 89.74,40 X3.13
  BOTTOM w1.27: VD76.C 95.11,40.97 arc(94.73,40.89) 94.4,40.67 94.03,40.3 arc(93.7,40.08) 93.32,40 X3.13 89.74,40
+IN16: length 8.3
  TOP w1.27: 89.74,29.84 X3.15
  BOTTOM w0.75: 87.75,30.35 VD81.C 83.7,30.35
  BOTTOM w1.27: 89.74,29.84 X3.15
-IN1: length 7.7
  TOP w1.27: 89.74,203.2 X2.2
  BOTTOM w1.27: X2.2 93.32,203.2 arc(93.7,203.12) 94.03,202.91 94.4,202.53 arc(94.73,202.32) 95.11,202.24 VD7.A
-IN2: length 7.4
  TOP w1.27: 89.74,193.04 X2.4
  BOTTOM w1.27: X2.4 VD16.A
-IN3: length 7.7
  TOP w1.27: 89.74,182.88 X2.6
  BOTTOM w1.27: VD21.A 95.11,181.92 arc(94.73,182) 94.4,182.21 94.03,182.59 arc(93.7,182.8) 93.32,182.88 X2.6
-IN4: length 7.4
  TOP w1.27: 89.74,172.72 X2.8
  BOTTOM w1.27: X2.8 VD26.A
-IN5: length 7.7
  TOP w1.27: 89.74,162.56 X2.10
  BOTTOM w1.27: X2.10 93.32,162.56 arc(93.7,162.48) 94.03,162.27 94.4,161.89 arc(94.73,161.68) 95.11,161.6 VD31.A
-IN6: length 7.4
  TOP w1.27: 89.74,152.4 X2.12
  BOTTOM w1.27: X2.12 VD36.A
-IN7: length 7.7
  TOP w1.27: 89.74,142.24 X2.14
  BOTTOM w1.27: X2.14 93.32,142.24 arc(93.7,142.16) 94.03,141.95 94.4,141.57 arc(94.73,141.36) 95.11,141.28 VD41.A
-IN8: length 7.4
  TOP w1.27: 89.74,132.08 X2.16
  BOTTOM w1.27: X2.16 VD46.A
-IN9: length 7.7
  TOP w1.27: 89.74,95.88 X3.2
  BOTTOM w1.27: VD12.A 95.11,94.92 arc(94.73,95) 94.4,95.22 94.03,95.59 arc(93.7,95.81) 93.32,95.88 X3.2
-IN10: length 7.4
  TOP w1.27: 89.74,85.72 X3.4
  BOTTOM w1.27: X3.4 VD51.A
-IN11: length 7.7
  TOP w1.27: 89.74,75.56 X3.6
  BOTTOM w1.27: VD56.A 95.11,74.6 arc(94.73,74.68) 94.4,74.9 94.03,75.27 arc(93.7,75.49) 93.32,75.56 X3.6
-IN12: length 7.4
  TOP w1.27: 89.74,65.41 X3.8
  BOTTOM w1.27: X3.8 VD61.A
-IN13: length 7.7
  TOP w1.27: 89.74,55.25 X3.10
  BOTTOM w1.27: X3.10 93.32,55.25 arc(93.7,55.17) 94.03,54.95 94.4,54.58 arc(94.73,54.36) 95.11,54.28 VD66.A
-IN14: length 7.4
  TOP w1.27: 89.74,45.08 X3.12
  BOTTOM w1.27: X3.12 VD71.A
-IN15: length 7.7
  TOP w1.27: 89.74,34.92 X3.14
  BOTTOM w1.27: X3.14 93.32,34.92 arc(93.7,34.85) 94.03,34.63 94.4,34.26 arc(94.73,34.04) 95.11,33.97 VD76.A
-IN16: length 7.4
  TOP w1.27: 89.74,24.77 X3.16
  BOTTOM w1.27: X3.16 VD81.A
_IN+_A1: length 20.8
  BOTTOM w0.5: R8.2 41.28,208.51 ; R8.2 41.28,206.5 ; R8.2 43.08,207.5 ; R6.2 46.89,207.5 ; R6.2 45.08,206.5 ; R6.2 45.08,208.51 ; R6.2 43.28,207.5 ; C5.1 59.77,206.6 ; C5.1 57.07,206.6 ; C5.1 58.42,207.68 ; 37.61,206.8 VD5.C 38.34,206.8 ; VD6.C 48.89,208.73 ; VD6.C 50.37,207.25 ; VD6.C 47.42,207.25
_IN+_A1_B1: length 21.3
  BOTTOM w0.5: 38.34,196.54 VD15.C 39.92,196.54 ; 59.87,196.44 C11.1 58.42,197.62 ; 55.25,196.24 R19.2 ; R19.2 53.34,197.34 ; R19.2 55.25,198.45 ; R18.2 53.34,197.34 ; R18.2 49.53,197.34 ; R18.2 51.44,198.45 ; R18.2 51.44,196.24 ; 46.05,197.09 VD18.C ; VD18.C 49.2,197.09 ; VD18.C 47.62,198.67
_IN+_A1_B2: length 21.3
  BOTTOM w0.5: 38.34,135.58 VD45.C 39.92,135.58 ; R54.2 51.44,137.49 ; R54.2 49.53,136.38 ; R54.2 53.34,136.38 ; R54.2 51.44,135.28 ; VD48.C 47.62,137.71 ; VD48.C 49.2,136.13 ; VD48.C 46.05,136.13 ; 58.42,136.66 C29.1 59.87,135.49 ; 53.34,136.38 R55.2 ; R55.2 55.25,135.28 ; R55.2 55.25,137.49
_IN+_A1_B8: length 20.8
  BOTTOM w0.5: 43.28,187.19 R24.2 ; R24.2 45.08,186.18 ; R24.2 45.08,188.19 ; R24.2 46.89,187.19 ; 37.61,186.48 VD20.C 38.34,186.48 ; 41.28,186.18 R25.2 ; R25.2 41.28,188.19 ; R25.2 43.08,187.19 ; C14.1 59.77,186.28 ; C14.1 57.07,186.28 ; C14.1 58.42,187.36 ; VD23.C 48.89,188.41 ; VD23.C 50.37,186.94 ; VD23.C 47.42,186.94
_IN+_A1_B9: length 21.3
  BOTTOM w0.5: VD28.C 47.62,178.35 ; VD28.C 46.05,176.78 ; VD28.C 49.2,176.78 ; 38.34,176.22 VD25.C 39.92,176.22 ; 49.53,177.03 R30.2 ; R30.2 53.34,177.03 ; R30.2 51.44,178.13 ; R30.2 51.44,175.92 ; 59.87,176.12 C17.1 58.42,177.3 ; 53.34,177.03 R31.2 ; R31.2 55.25,178.13 ; R31.2 55.25,175.92
_IN+_A1_B10: length 20.8
  BOTTOM w0.5: 37.61,166.16 VD30.C 38.34,166.16 ; R36.2 46.89,166.87 ; R36.2 45.08,167.87 ; R36.2 45.08,165.86 ; R36.2 43.28,166.87 ; R37.2 43.08,166.87 ; R37.2 41.28,165.86 ; R37.2 41.28,167.87 ; 57.07,165.97 C20.1 ; C20.1 58.42,167.04 ; C20.1 59.77,165.97 ; 47.42,166.62 VD33.C ; VD33.C 48.89,168.09 ; VD33.C 50.37,166.62
_IN+_A1_B11: length 21.3
  BOTTOM w0.5: 59.87,155.81 C23.1 58.42,156.98 ; 55.25,155.6 R43.2 ; R43.2 53.34,156.7 ; R43.2 55.25,157.81 ; R42.2 51.44,157.81 ; R42.2 53.34,156.7 ; R42.2 49.53,156.7 ; R42.2 51.44,155.6 ; VD38.C 49.2,156.45 ; VD38.C 46.05,156.45 ; VD38.C 47.62,158.03 ; 38.34,155.9 VD35.C 39.92,155.9
_IN+_A1_B12: length 20.8
  BOTTOM w0.5: 57.07,145.65 C26.1 ; C26.1 59.77,145.65 ; C26.1 58.42,146.72 ; 43.28,146.54 R48.2 ; R48.2 46.89,146.54 ; R48.2 45.08,145.54 ; R48.2 45.08,147.55 ; VD43.C 48.89,147.77 ; VD43.C 47.42,146.29 ; VD43.C 50.37,146.29 ; 38.34,145.84 VD40.C 37.61,145.84 ; R49.2 43.08,146.54 ; R49.2 41.28,145.54 ; R49.2 41.28,147.55
_IN+_A2: length 20.8
  BOTTOM w0.5: C8.1 59.77,99.29 ; C8.1 57.07,99.29 ; C8.1 58.42,100.37 ; 37.61,99.49 VD10.C 38.34,99.49 ; 47.42,99.94 VD11.C ; VD11.C 48.89,101.42 ; VD11.C 50.37,99.94 ; R12.2 46.89,100.19 ; R12.2 45.08,101.19 ; R12.2 45.08,99.19 ; R12.2 43.28,100.19 ; R14.2 43.08,100.19 ; R14.2 41.28,99.19 ; R14.2 41.28,101.19
_IN+_A2_B1: length 21.3
  BOTTOM w0.5: VD53.C 47.62,91.36 ; VD53.C 49.2,89.78 ; VD53.C 46.05,89.78 ; R60.2 51.44,91.13 ; R60.2 51.44,88.93 ; R60.2 53.34,90.03 ; R60.2 49.53,90.03 ; 53.34,90.03 R61.2 ; R61.2 55.25,88.93 ; R61.2 55.25,91.13 ; 39.92,89.23 VD50.C 38.34,89.23 ; 58.42,90.31 C32.1 59.87,89.13
_IN+_A2_B2: length 21.3
  BOTTOM w0.5: 39.92,28.27 VD80.C 38.34,28.27 ; VD83.C 49.2,28.82 ; VD83.C 46.05,28.82 ; VD83.C 47.62,30.4 ; 53.34,29.07 R97.2 ; R97.2 55.25,30.17 ; R97.2 55.25,27.97 ; R96.2 51.44,30.17 ; R96.2 51.44,27.97 ; R96.2 53.34,29.07 ; R96.2 49.53,29.07 ; 58.42,29.35 C50.1 59.87,28.17
_IN+_A2_B8: length 20.8
  BOTTOM w0.5: 57.07,78.97 C35.1 ; C35.1 58.42,80.05 ; C35.1 59.77,78.97 ; 47.42,79.62 VD58.C ; VD58.C 50.37,79.62 ; VD58.C 48.89,81.1 ; 41.28,79.87 41.28,80.87 ; 41.28,79.87 43.08,79.87 ; 41.28,79.87 41.28,78.87 ; 43.28,79.87 45.08,79.87 ; 45.08,79.87 46.89,79.87 ; 45.08,79.87 45.08,80.87 ; 45.08,79.87 45.08,78.87 ; 38.34,79.17 VD55.C 37.61,79.17
_IN+_A2_B9: length 21.3
  BOTTOM w0.5: 49.53,69.71 R72.2 ; R72.2 53.34,69.71 ; R72.2 51.44,68.61 ; R72.2 51.44,70.81 ; 55.25,68.61 R73.2 ; R73.2 53.34,69.71 ; R73.2 55.25,70.81 ; 58.42,69.99 C38.1 59.87,68.81 ; 38.34,68.91 VD60.C 39.92,68.91 ; VD63.C 47.62,71.04 ; VD63.C 49.2,69.46 ; VD63.C 46.05,69.46
_IN+_A2_B10: length 20.8
  BOTTOM w0.5: R78.2 46.89,59.55 ; R78.2 43.28,59.55 ; R78.2 45.08,60.55 ; R78.2 45.08,58.55 ; VD68.C 50.37,59.3 ; VD68.C 47.42,59.3 ; VD68.C 48.89,60.78 ; 37.61,58.85 VD65.C 38.34,58.85 ; R79.2 43.08,59.55 ; R79.2 41.28,58.55 ; R79.2 41.28,60.55 ; C41.1 58.42,59.73 ; C41.1 57.07,58.65 ; C41.1 59.77,58.65
_IN+_A2_B11: length 21.3
  BOTTOM w0.5: 49.53,49.39 R84.2 ; R84.2 53.34,49.39 ; R84.2 51.44,48.29 ; R84.2 51.44,50.49 ; VD73.C 49.2,49.14 ; VD73.C 47.62,50.72 ; VD73.C 46.05,49.14 ; 58.42,49.67 C44.1 59.87,48.49 ; 53.34,49.39 R85.2 ; R85.2 55.25,50.49 ; R85.2 55.25,48.29 ; 39.92,48.59 VD70.C 38.34,48.59
_IN+_A2_B12: length 20.8
  BOTTOM w0.5: R91.2 41.28,40.23 ; R91.2 41.28,38.23 ; R91.2 43.08,39.23 ; C47.1 58.42,39.41 ; C47.1 57.07,38.33 ; C47.1 59.77,38.33 ; R90.2 46.89,39.23 ; R90.2 45.08,40.23 ; R90.2 45.08,38.23 ; R90.2 43.28,39.23 ; 47.42,38.98 VD78.C ; VD78.C 48.89,40.46 ; VD78.C 50.37,38.98 ; 38.34,38.53 VD75.C 37.61,38.53
_IN-_A1: length 14.8
  BOTTOM w0.5: 57.07,203.6 C5.2 58.42,202.53 ; 39.6,203.84 R9.2 37.59,203.84 ; R6.1 45.08,203.71 ; R6.1 46.89,202.7 ; R6.1 43.28,202.7 ; 43.08,202.7 R8.1 41.28,203.71 ; 50.37,202.95 VD6.A 47.42,202.95
_IN-_A1_B1: length 16.6
  BOTTOM w0.5: R18.1 53.24,192.54 ; R18.1 51.44,193.55 ; R18.1 49.63,192.54 ; 53.44,192.54 R19.1 ; R19.1 57.05,192.54 ; R19.1 55.25,193.55 ; 57.07,193.44 C11.2 58.42,192.37 ; 46.15,192.79 VD18.A 49.1,192.79 ; 39.6,193.67 R21.2 37.59,193.67
_IN-_A1_B2: length 16.6
  BOTTOM w0.5: R55.1 55.25,132.59 ; R55.1 57.05,131.59 ; R55.1 53.44,131.59 ; 37.59,132.72 R57.2 39.6,132.72 ; 58.42,131.41 C29.2 57.07,132.49 ; R54.1 51.44,132.59 ; R54.1 49.63,131.59 ; R54.1 53.24,131.59 ; 46.15,131.84 VD48.A 49.1,131.84
